# Altium PCB H01R0.PcbDoc
Units mil, origin at the board's own origin, x right, y up, seen from the top; angles counter-clockwise.
Board outline 1363.78 x 1181.1 mil, 2 copper layers (Top Layer, Bottom Layer); 38 components, 23 nets, 101 pads, 0 vias.
Unrouted connection lines stored in the file: 52.
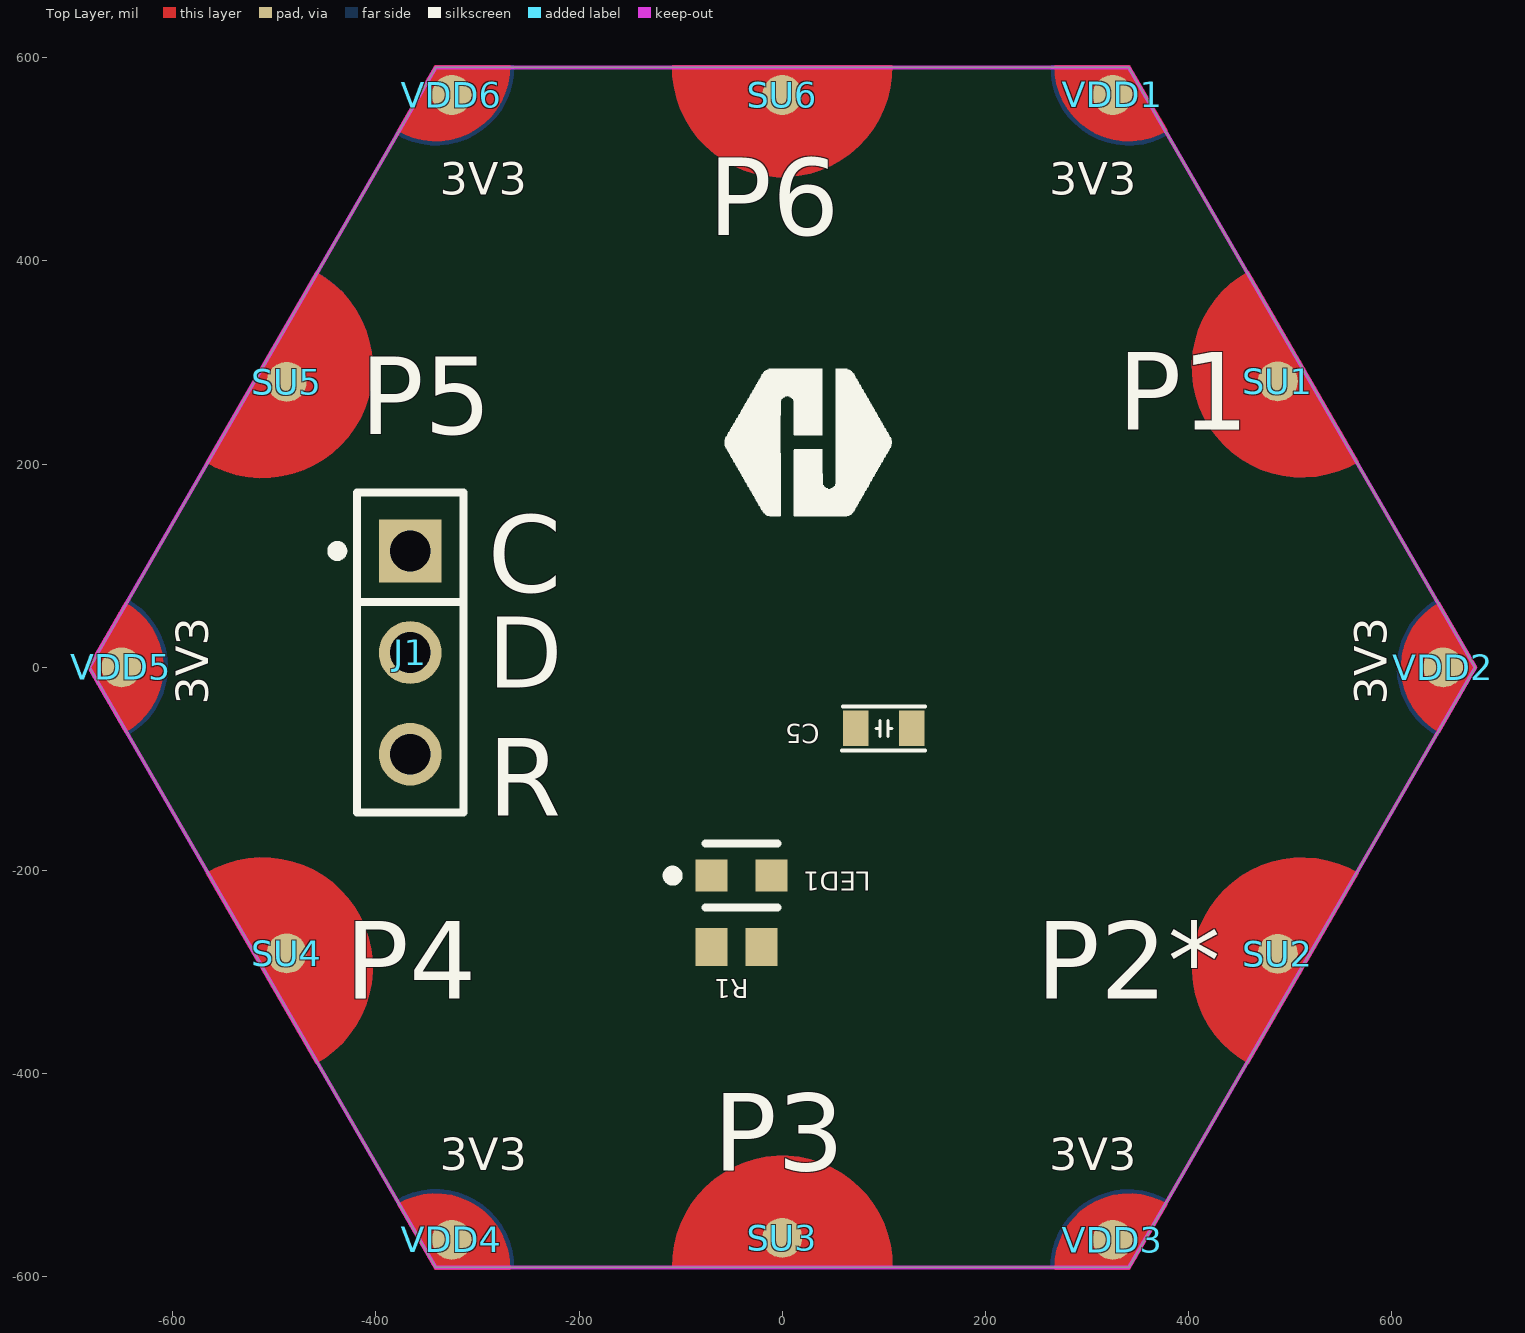
[diagram p0: Top Layer view]
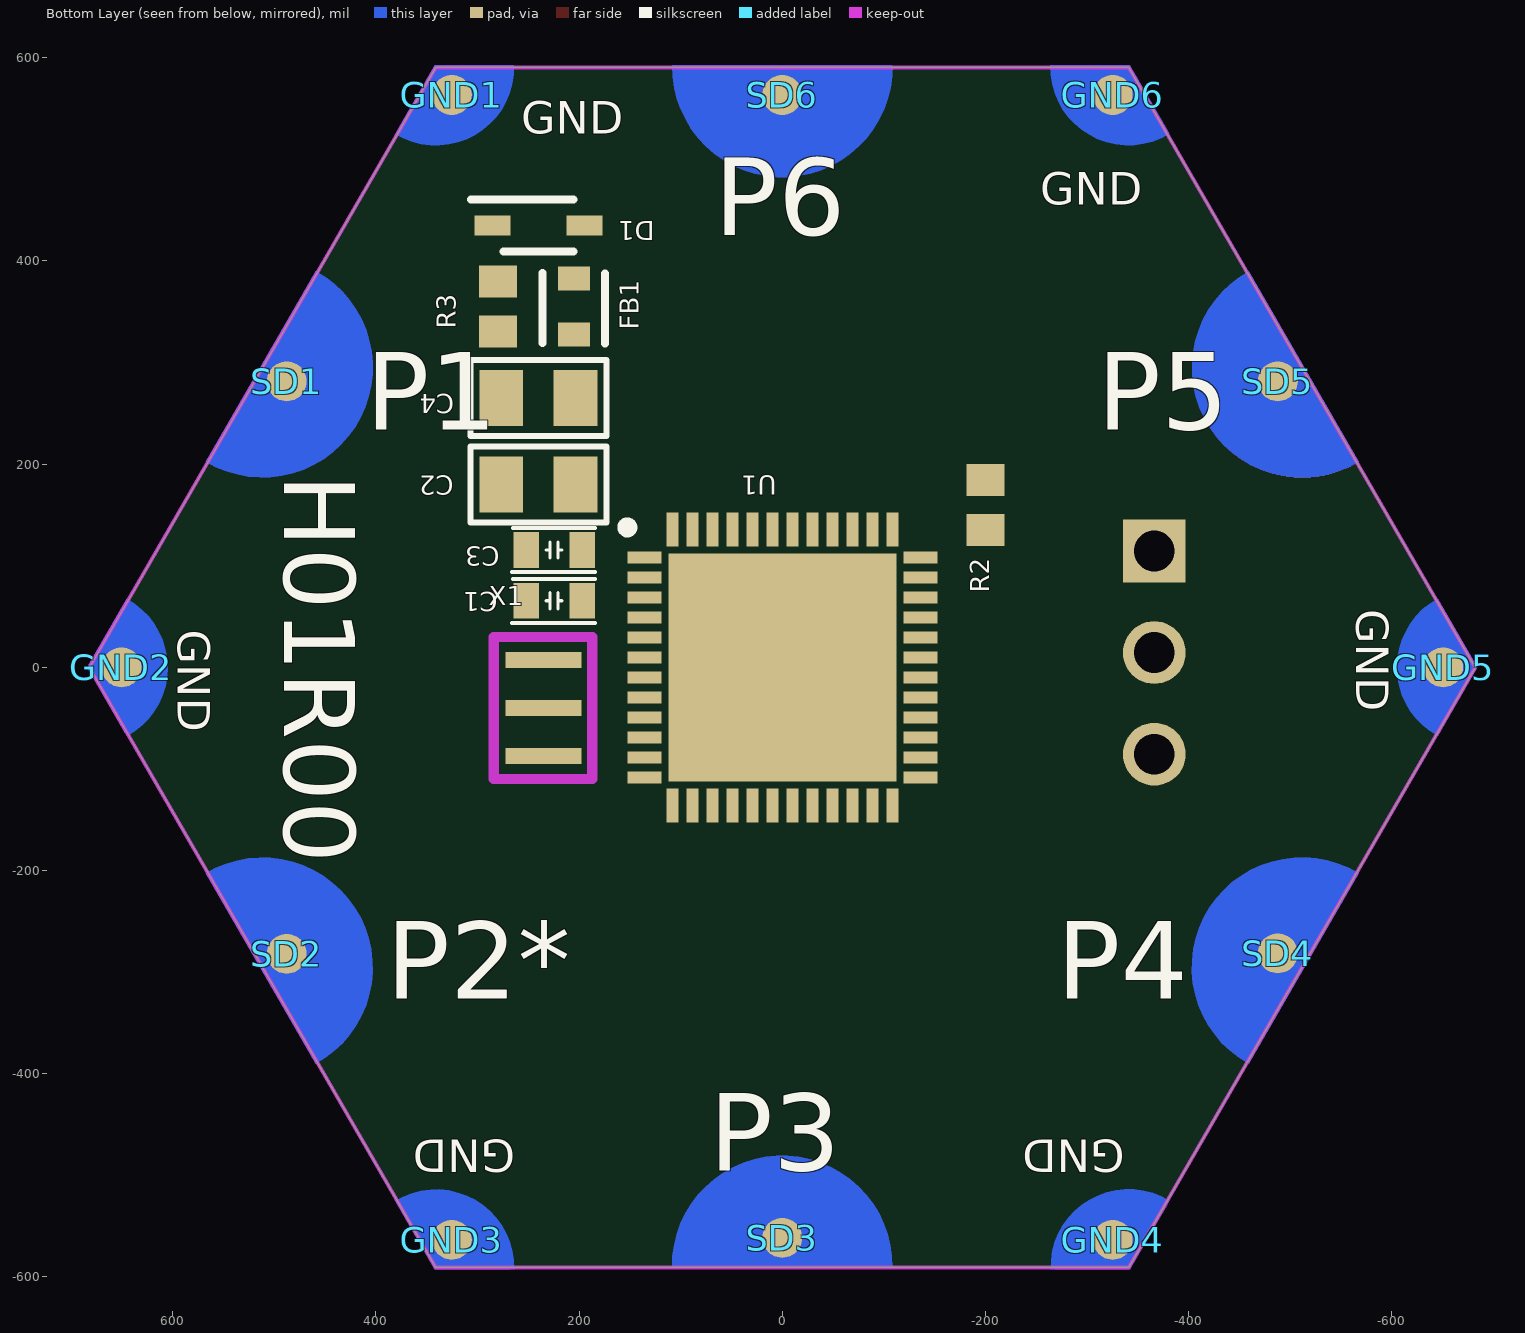
[diagram p1: Bottom Layer view, seen from below]

## Layer stack, top to bottom
Top Solder: solder mask 0.4, Solder Resist, Dk 3.5
Top Layer: signal copper 1.4
Dielectric 1: dielectric 12.6, FR-4, Dk 4.8
Bottom Layer: signal copper 1.4
Bottom Solder: solder mask 0.4, Solder Resist, Dk 3.5

## Board outline
-340.94,-590.55 340.94,-590.55 681.89,0 340.94,590.55 -340.94,590.55 -681.89,0

## Design rules (kind name [scope] priority, off if disabled: settings)
Clearance [All] p1: gap=10 ignorepadtopadclearanceinfootprint=FALSE
PolygonConnect [All] p1: connectstyle=Relief reliefconductorwidth=10 reliefentries=4 polygonreliefangle="90 Angle" airgapwidth=10
RoutingVias [All] p1: holewidth=28 width=50 viastyle="Through Hole" minholewidth=28 minwidth=50 maxholewidth=28 maxwidth=50
SolderMaskExpansion [All] p1: expansion=4 istentingtop=FALSE
SupplyNets "Schematic Supply Nets_3" [InNet('GND')] p1: voltage=0.000
SupplyNets "Schematic Supply Nets_2" [InNet('VDDA')] p2: voltage=0.000
SupplyNets "Schematic Supply Nets_1" [InNet('VSSA')] p3: voltage=0.000
SupplyNets "Schematic Supply Nets" [InNet('VDD')] p4: voltage=0.000
Width [All] p1: maxlimit=10 minlimit=10 preferedwidth=10
30 further rules are at their usual default settings.

## Components (designator, comment, footprint, x,y, rotation, side; value= is the part's Value field where it differs from the comment)
C1 "CL10B104KA8NNNC" C0603 224.63,65.59 r180 bottom value=100nF
C2 "CL21X475KAQNNNE" C0805 240,180 r0 bottom value=4.7µF
C3 "CL10B104KA8NNNC" C0603 224.63,115.59 r180 bottom value=100nF
C4 "CC0805KKX7R7BB105" C0805 240,265 r180 bottom value=1µF
C5 "CL10B104KA8NNNC" C0603 100,-60 r0 top value=100nF
D1 "CDSOD323-T03SC" SOD2513X114N 240,435 r180 bottom value=200pF
FB1 "MMZ1608Y300B" FP-MMZ1608-0_8-MFG 205,355 r270 bottom
GND1 "HEXABIT_UART_PORT" HEXABIT_POWER_PORT_D 325.2,563.39 r0 top
GND2 "HEXABIT_UART_PORT" HEXABIT_POWER_PORT_D 650.39,0 r300 top
GND3 "HEXABIT_UART_PORT" HEXABIT_POWER_PORT_D 325.2,-563.39 r240 top
GND4 "HEXABIT_UART_PORT" HEXABIT_POWER_PORT_D -325.2,-563.39 r180 top
GND5 "HEXABIT_UART_PORT" HEXABIT_POWER_PORT_D -650.39,0 r120 top
GND6 "HEXABIT_UART_PORT" HEXABIT_POWER_PORT_D -325.2,563.39 r60 top
J1 "TSW-103-14-G-S" FP-TSW-103-14-G-S-MFG -366.16,14.58 r270 top
LED1 "VLMS1300-GS08" FP-6_541-5092_01-4-MFG -40,-205 r0 top
R1 "Manufacturer Part Number" R0603 -45,-275 r180 top value=270Ω
R2 "Manufacturer Part Number" R0603 -200,160 r90 bottom value=10kΩ
R3 "Manufacturer Part Number" R0603 280,355 r270 bottom
SD1 "HEXABIT_UART_PORT" HEXABIT_UART_PORT_D 487.8,281.5 r0 top
SD2 "HEXABIT_UART_PORT" HEXABIT_UART_PORT_D 487.8,-281.89 r300 top
SD3 "HEXABIT_UART_PORT" HEXABIT_UART_PORT_D 0,-561.5 r240 top
SD4 "HEXABIT_UART_PORT" HEXABIT_UART_PORT_D -487.8,-281.5 r180 top
SD5 "HEXABIT_UART_PORT" HEXABIT_UART_PORT_D -487.8,281.5 r120 top
SD6 "HEXABIT_UART_PORT" HEXABIT_UART_PORT_D 0,563.39 r60 top
SU1 "HEXABIT_UART_PORT" HEXABIT_UART_PORT_U 487.8,281.5 r0 top
SU2 "HEXABIT_UART_PORT" HEXABIT_UART_PORT_U 487.8,-281.89 r300 top
SU3 "HEXABIT_UART_PORT" HEXABIT_UART_PORT_U 0,-561.5 r240 top
SU4 "HEXABIT_UART_PORT" HEXABIT_UART_PORT_U -487.8,-281.5 r180 top
SU5 "HEXABIT_UART_PORT" HEXABIT_UART_PORT_U -487.8,281.11 r120 top
SU6 "HEXABIT_UART_PORT" HEXABIT_UART_PORT_U 0,563.39 r60 top
U1 "STM32G0B1CEU6" QFN50P700X700X65-49N-D 0,0 r180 bottom
VDD1 "HEXABIT_UART_PORT" HEXABIT_POWER_PORT_U 325.2,563.39 r60 top
VDD2 "HEXABIT_UART_PORT" HEXABIT_POWER_PORT_U 650.39,0 r0 top
VDD3 "HEXABIT_UART_PORT" HEXABIT_POWER_PORT_U 325.2,-563.39 r300 top
VDD4 "HEXABIT_UART_PORT" HEXABIT_POWER_PORT_U -325.2,-563.39 r240 top
VDD5 "HEXABIT_UART_PORT" HEXABIT_POWER_PORT_U -650.39,0 r180 top
VDD6 "HEXABIT_UART_PORT" HEXABIT_POWER_PORT_U -325.2,563.39 r120 top
X1 "CSTCE8M00G52Z-R0" XTALL_CSTCE8M00G52 235,-40 r0 bottom value=10pF

## Footprints (in the part's own frame and the unit in brackets; to place one, negate y for a bottom-side part, rotate by r counter-clockwise, add the part's x,y. Pads: shape width x height; smd on the part's side, far side on the other; paste and mask are expansions set on the pad)
C0603 [mm]
  rect 0.64x0.89 smd mask+0.05: 1(-0.7,0) 2(0.7,0)
  silkscreen extent -1.05,-0.55 1.02,0.55, body extent -0.9,-0.5 0.9,0.5, height 1.4
C0805 [mil]
  rect 43x55 smd: 1(-36.5,0) 2(36.5,0)
  silkscreen extent -67,-37 67,37, body extent -39,-24 40,25, height 31
FP-6_541-5092_01-4-MFG [mm]
  rect 0.8x0.8 smd paste+0 mask+0: 1(-0.75,0) 2(0.75,0)
  silkscreen extent -1.85,-0.8 0.9,0.8, body extent -1.25,-0.6 1.25,0.6, height 0.25
FP-MMZ1608-0_8-MFG [mm]
  rect 0.6x0.8 smd paste+0 mask+0: 1(-0.7,0) 2(0.7,0)
  silkscreen extent -0.85,-0.79 0.92,0.77, body extent -0.8,-0.4 0.8,0.4, height 0.95
FP-TSW-103-14-G-S-MFG [mm]
  rect 1.57x1.57 hole 1.02 paste-2539.97 mask+0: 1(-2.54,0)
  round 1.57 hole 1.02 paste-2539.97 mask+0: 2(0,0) 3(2.54,0)
  silkscreen extent -4,-1.95 4,1.34, body extent -4.1,-1.44 4.1,1.44, height 0.25
HEXABIT_POWER_PORT_D [mm]
  rrect100% 1x1 smd far side paste+0: Pwr_D(0,0)
  Bottom Layer region: 1.418,-0.978 0.633,-1.25 -0.194,-1.171 -0.914,-0.754 -1.394,-0.076 -1.549,0.74 -1.549,0.74 0.429,0.74
HEXABIT_POWER_PORT_U [mm]
  rrect100% 1x1 smd paste+0: Pwr_U(0,0)
  Top Layer region: -0.081,-1.631 -0.68,-1.115 -1.01,-0.395 -1.01,0.395 -0.68,1.115 -0.081,1.631 -0.081,1.631 0.858,0
HEXABIT_UART_PORT_D [mm]
  rrect100% 1x1 smd far side paste+0: UART_D(0,0)
  Bottom Layer region: 2.018,-2.008 0.84,-2.391 -0.386,-2.219 -1.413,-1.526 -2.032,-0.453 -2.117,0.782 -1.653,1.93 -0.731,2.758 -0.731,2.758
HEXABIT_UART_PORT_U [mm]
  rrect100% 1x1 smd paste+0: UART_U(0,0)
  Top Layer region: 2.018,-2.008 0.84,-2.391 -0.386,-2.219 -1.413,-1.526 -2.032,-0.453 -2.117,0.782 -1.653,1.93 -0.731,2.758 -0.731,2.758
QFN50P700X700X65-49N-D [mm]
  rect 0.85x0.3 smd mask+0: 1(-3.45,2.75) 2(-3.45,2.25) 3(-3.45,1.75) 4(-3.45,1.25) 5(-3.45,0.75) 6(-3.45,0.25) 7(-3.45,-0.25) 8(-3.45,-0.75) 9(-3.45,-1.25) 10(-3.45,-1.75) 11(-3.45,-2.25) 12(-3.45,-2.75) 25(3.45,-2.75) 26(3.45,-2.25) 27(3.45,-1.75) 28(3.45,-1.25) 29(3.45,-0.75) 30(3.45,-0.25) 31(3.45,0.25) 32(3.45,0.75) 33(3.45,1.25) 34(3.45,1.75) 35(3.45,2.25) 36(3.45,2.75)
  rect 0.3x0.85 smd mask+0: 13(-2.75,-3.45) 14(-2.25,-3.45) 15(-1.75,-3.45) 16(-1.25,-3.45) 17(-0.75,-3.45) 18(-0.25,-3.45) 19(0.25,-3.45) 20(0.75,-3.45) 21(1.25,-3.45) 22(1.75,-3.45) 23(2.25,-3.45) 24(2.75,-3.45) 37(2.75,3.45) 38(2.25,3.45) 39(1.75,3.45) 40(1.25,3.45) 41(0.75,3.45) 42(0.25,3.45) 43(-0.25,3.45) 44(-0.75,3.45) 45(-1.25,3.45) 46(-1.75,3.45) 47(-2.25,3.45) 48(-2.75,3.45)
  rect 5.7x5.7 smd mask+0: 49(0,0)
  silkscreen extent -4,3.38 -3.75,3.62, body extent -3.56,-3.56 3.56,3.56, height 0.61
R0603 [mm] "Chip Resistor, 2-Leads, Body 1.55x0.85mm, IPC Medium Density"
  rect 0.8x0.95 smd: 1(-0.625,0) 2(0.625,0)
  body extent -0.82,-0.48 0.82,0.48, height 0.5
SOD2513X114N [mm]
  rect 0.9x0.5 smd: 1(-1.15,0) 2(1.15,0)
  silkscreen extent -1.69,-0.65 0.87,0.65, body extent -1.27,-0.65 1.27,0.65, height 1.14
XTALL_CSTCE8M00G52 [mm]
  rect 1.9x0.4 smd: P$1(0,1.2) P$2(0,0) P$3(0,-1.2)
  Top Layer keep-out lines w0.254: -1.219,1.778 -1.219,-1.778 1.245,-1.778 1.245,1.778 -1.219,1.778
  body extent -0.67,-1.6 0.64,1.6, height 0.8

## Part data
C1 C3 C5: library part "generic Capacitor", "Ceramic Capacitor, Multilayer, Ceramic, 25V, 10% +Tol, 10% -Tol, X7R, +-15% TC, 100nF, Surface Mount, 0603 inch", Case Code (Imperial)=0603, Case Code (Metric)=1608, Dielectric=X7R, Dielectric Material=Ceramic, Manufacturer="Samsung Electro-Mechanics", Max Operating Temperature=125°C, Min Operating Temperature=-55°C, Tolerance=10%, Voltage=25V, Case/Package=0603, Category="Ceramic Capacitors", China RoHS=Compliant, ComponentLink1Description=https://datasheet.octopart.com:443/CL10B104KA8NNNC-Samsung-Electro-Mechanics-datasheet-137745067.pdf?src-supplier=Newark, ComponentLink1URL=https://datasheet.octopart.com:443/CL10B104KA8NNNC-Samsung-Electro-Mechanics-datasheet-137745067.pdf?src-supplier=Newark, ComponentLink2Description=https://datasheet.octopart.com:443/CL10B104KA8NNNC-Samsung-Electro-Mechanics-datasheet-181551448.pdf?src-supplier=Newark, ComponentLink2URL=https://datasheet.octopart.com:443/CL10B104KA8NNNC-Samsung-Electro-Mechanics-datasheet-181551448.pdf?src-supplier=Newark, ComponentLink3Description=https://datasheet.octopart.com/CL10B104KA8NNNC-Samsung-Electro-Mechanics-datasheet-8324245.pdf, ComponentLink3URL=https://datasheet.octopart.com/CL10B104KA8NNNC-Samsung-Electro-Mechanics-datasheet-8324245.pdf, ComponentLink4Description=https://datasheet.octopart.com/CL10B104KA8NNNC-Samsung-Electro-Mechanics-datasheet-97040617.pdf, ComponentLink4URL=https://datasheet.octopart.com/CL10B104KA8NNNC-Samsung-Electro-Mechanics-datasheet-97040617.pdf, ComponentLink5Description=https://datasheet.octopart.com/General-Multilayer-Ceramic-Capacitors-Samsung-datasheet-family-111.pdf, ComponentLink5URL=https://datasheet.octopart.com/General-Multilayer-Ceramic-Capacitors-Samsung-datasheet-family-111.pdf, ComponentLink6Description=https://datasheet.octopart.com:443/CL10B104KA8NNNC-Samsung-Electro-Mechanics-datasheet-116890967.pdf?src-supplier=Future+Electronics, ComponentLink6URL=https://datasheet.octopart.com:443/CL10B104KA8NNNC-Samsung-Electro-Mechanics-datasheet-116890967.pdf?src-supplier=Future+Electronics, ComponentLink7Description=https://datasheet.octopart.com:443/CL10B104KA8NNNC-Samsung-Electro-Mechanics-datasheet-81461838.pdf?src-supplier=Future+Electronics, ComponentLink7URL=https://datasheet.octopart.com:443/CL10B104KA8NNNC-Samsung-Electro-Mechanics-datasheet-81461838.pdf?src-supplier=Future+Electronics, ComponentLink8Description=https://datasheet.octopart.com:443/CL10B104KA8NNNC-Samsung-datasheet-42770371.pdf?src-supplier=Future+Electronics, ComponentLink8URL=https://datasheet.octopart.com:443/CL10B104KA8NNNC-Samsung-datasheet-42770371.pdf?src-supplier=Future+Electronics, ComponentLink9Description=https://datasheet.octopart.com:443/CL10B104KA8NNNC-Samsung-datasheet-26589152.pdf?src-supplier=Future+Electronics, ComponentLink9URL=https://datasheet.octopart.com:443/CL10B104KA8NNNC-Samsung-datasheet-26589152.pdf?src-supplier=Future+Electronics, ComponentLink10Description=https://datasheet.octopart.com:443/CL10B104KA8NNNC-Samsung-Electro-Mechanics-datasheet-149136783.pdf?src-supplier=Future+Electronics, ComponentLink10URL=https://datasheet.octopart.com:443/CL10B104KA8NNNC-Samsung-Electro-Mechanics-datasheet-149136783.pdf?src-supplier=Future+Electronics, ComponentLink11Description=https://datasheet.octopart.com:443/CL10B104KA8NNNC-Samsung-datasheet-59220082.pdf?src-supplier=TME, ComponentLink11URL=https://datasheet.octopart.com:443/CL10B104KA8NNNC-Samsung-datasheet-59220082.pdf?src-supplier=TME, ComponentLink12Description=https://datasheet.octopart.com:443/CL10B104KA8NNNC-Samsung-Electro-Mechanics-datasheet-11756025.pdf?src-supplier=Arrow+Electronics, ComponentLink12URL=https://datasheet.octopart.com:443/CL10B104KA8NNNC-Samsung-Electro-Mechanics-datasheet-11756025.pdf?src-supplier=Arrow+Electronics, ComponentLink13Description=http://sigma.octopart.com:80/rohs_certificate/General-Multilayer-Ceramic-Capacitors-Samsung-family-110.pdf?src-supplier=Compliance+Statements, ComponentLink13URL=http://sigma.octopart.com:80/rohs_certificate/General-Multilayer-Ceramic-Capacitors-Samsung-family-110.pdf?src-supplier=Compliance+Statements, ComponentLink14Description=http://sigma.octopart.com:80/rohs_statement/General-Multilayer-Ceramic-Capacitors-Samsung-family-132.pdf?src-supplier=Compliance+Statements, ComponentLink14URL=http://sigma.octopart.com:80/rohs_statement/General-Multilayer-Ceramic-Capacitors-Samsung-family-132.pdf?src-supplier=Compliance+Statements, ComponentLink15Description=http://sigma.octopart.com:80/reach_statement/General-Multilayer-Ceramic-Capacitors-Samsung-family-133.pdf?src-supplier=Compliance+Statements, ComponentLink15URL=http://sigma.octopart.com:80/reach_statement/General-Multilayer-Ceramic-Capacitors-Samsung-family-133.pdf?src-supplier=Compliance+Statements, Depth=800µm, Height=800µm, Lead Free="Lead Free", Length=1.6mm, Library=Hexabitz, Lifecycle Status=Production, Manufacturer Part Number=CL10B104KA8NNNC, Material=Ceramic, Mounting Technology="Surface Mount", Number of Terminals=2, Pricing="4000=0.00265, 8000=0.00263, 16000=0.00262, 24000=0.00261, 32000=0.00259 (USD)", Radiation Hardening=No, REACH SVHC=Yes, RoHS=Compliant, Schedule B="8532240020, 8532240020|8532240020, 8532240020|8532240020|8532240020, 8532240020|8532240020|8532240020|8532240020", Stock=1332000, Supplier=Avnet, Supplier Part Number=CL10B104KA8NNNC, Thickness=889µm, Voltage Rating=25V, Voltage Rating (DC)=25V, Width=800µm
C2: library part "generic Capacitor", "Ceramic Capacitor, Multilayer, Ceramic, 25V, 10% +Tol, 10% -Tol, X6S, +-22% TC, 4.7uF, Surface Mount, 0805 inch", Case Code (Imperial)=0805, Case Code (Metric)=2012, Dielectric=X6S, Dielectric Material=Ceramic, Manufacturer="Samsung Electro-Mechanics", Max Operating Temperature=105°C, Min Operating Temperature=-55°C, Supplier Part Number=1276-3033-1-ND, Tolerance=10%, Voltage Rating=25V, Case/Package=0805, Category="Ceramic Capacitors", China RoHS=Compliant, ComponentLink1Description=https://datasheet.octopart.com:443/CL21X475KAQNNNE-Samsung-Electro-Mechanics-datasheet-141347921.pdf?src-supplier=IHS, ComponentLink1URL=https://datasheet.octopart.com:443/CL21X475KAQNNNE-Samsung-Electro-Mechanics-datasheet-141347921.pdf?src-supplier=IHS, ComponentLink2Description=https://datasheet.octopart.com/CL21X475KAQNNNE-Samsung-Electro-Mechanics-datasheet-97040617.pdf, ComponentLink2URL=https://datasheet.octopart.com/CL21X475KAQNNNE-Samsung-Electro-Mechanics-datasheet-97040617.pdf, ComponentLink3Description=https://datasheet.octopart.com/CL21X475KAQNNNE-Samsung-Electro-Mechanics-datasheet-8324245.pdf, ComponentLink3URL=https://datasheet.octopart.com/CL21X475KAQNNNE-Samsung-Electro-Mechanics-datasheet-8324245.pdf, ComponentLink4Description=https://datasheet.octopart.com:443/CL21X475KAQNNNE-Samsung-datasheet-8326817.pdf?src-supplier=Future+Electronics, ComponentLink4URL=https://datasheet.octopart.com:443/CL21X475KAQNNNE-Samsung-datasheet-8326817.pdf?src-supplier=Future+Electronics, ComponentLink5Description=https://datasheet.octopart.com:443/CL21X475KAQNNNE-Samsung-datasheet-8326407.pdf?src-supplier=TME, ComponentLink5URL=https://datasheet.octopart.com:443/CL21X475KAQNNNE-Samsung-datasheet-8326407.pdf?src-supplier=TME, ComponentLink6Description=https://datasheet.octopart.com:443/CL21X475KAQNNNE-Samsung-Electro-Mechanics-datasheet-11541288.pdf?src-supplier=Arrow+Electronics, ComponentLink6URL=https://datasheet.octopart.com:443/CL21X475KAQNNNE-Samsung-Electro-Mechanics-datasheet-11541288.pdf?src-supplier=Arrow+Electronics, Depth=1.25mm, Height=1.4mm, Lead Free="Lead Free", Length=2mm, Library=Hexabitz, Lifecycle Status=Production, Manufacturer Part Number=CL21X475KAQNNNE, Material=Ceramic, Mounting Technology="Surface Mount", Number of Terminals=2, Packaging="Tape & Reel (TR)", Pricing="1=0.21, 10=0.124, 50=0.0886, 100=0.0778, 500=0.05972, 1000=0.05414 (USD)", REACH SVHC=Yes, RoHS=Compliant, Schedule B="8532240020, 8532240020|8532240020, 8532240020|8532240020|8532240020, 8532240020|8532240020|8532240020|8532240020", Stock=251721, Supplier=DigiKey, Thickness=1.397mm, Voltage Rating (DC)=25V, Width=1.25mm
C4: library part "generic Capacitor", "Ceramic Capacitor, Ceramic, 16V, 10% +Tol, 10% -Tol, X7R, 15% TC, 1uF, Surface Mount, 0805", Case Code (Imperial)=0805, Case Code (Metric)=2012, Dielectric=X7R, Dielectric Material=Ceramic, Manufacturer="Yageo Group", Manufacturer Package Identifier=CC0805-0.85, Max Operating Temperature=125°C, Min Operating Temperature=-55°C, Supplier Part Number=9937277, Tolerance=10%, Voltage Rating=16V, Case/Package=0805, Category="Ceramic Capacitors", China RoHS=Compliant, ComponentLink1Description=https://datasheet.octopart.com:443/CC0805KKX7R7BB105-Yageo-datasheet-177165144.pdf?src-supplier=IHS, ComponentLink1URL=https://datasheet.octopart.com:443/CC0805KKX7R7BB105-Yageo-datasheet-177165144.pdf?src-supplier=IHS, ComponentLink2Description=https://datasheet.octopart.com:443/CC0805KKX7R7BB105-Yageo-datasheet-78855689.pdf?src-supplier=Upverter, ComponentLink2URL=https://datasheet.octopart.com:443/CC0805KKX7R7BB105-Yageo-datasheet-78855689.pdf?src-supplier=Upverter, ComponentLink3Description=https://datasheet.octopart.com/CC0805KKX7R7BB105-Yageo-datasheet-10883670.pdf, ComponentLink3URL=https://datasheet.octopart.com/CC0805KKX7R7BB105-Yageo-datasheet-10883670.pdf, ComponentLink4Description=https://datasheet.octopart.com:443/CC0805KKX7R7BB105-Yageo-datasheet-140260305.pdf?src-supplier=SOS+electronic, ComponentLink4URL=https://datasheet.octopart.com:443/CC0805KKX7R7BB105-Yageo-datasheet-140260305.pdf?src-supplier=SOS+electronic, ComponentLink5Description=https://datasheet.octopart.com:443/CC0805KKX7R7BB105-Yageo-datasheet-147453679.pdf?src-supplier=Farnell, ComponentLink5URL=https://datasheet.octopart.com:443/CC0805KKX7R7BB105-Yageo-datasheet-147453679.pdf?src-supplier=Farnell, ComponentLink6Description=https://datasheet.octopart.com:443/CC0805KKX7R7BB105-Yageo-datasheet-181969634.pdf?src-supplier=Farnell, ComponentLink6URL=https://datasheet.octopart.com:443/CC0805KKX7R7BB105-Yageo-datasheet-181969634.pdf?src-supplier=Farnell, ComponentLink7Description=https://datasheet.octopart.com:443/CC0805KKX7R7BB105-Yageo-datasheet-62336348.pdf?src-supplier=element14+APAC, ComponentLink7URL=https://datasheet.octopart.com:443/CC0805KKX7R7BB105-Yageo-datasheet-62336348.pdf?src-supplier=element14+APAC, ComponentLink8Description=https://datasheet.octopart.com:443/CC0805KKX7R7BB105-Yageo-datasheet-166511530.pdf?src-supplier=Future+Electronics, ComponentLink8URL=https://datasheet.octopart.com:443/CC0805KKX7R7BB105-Yageo-datasheet-166511530.pdf?src-supplier=Future+Electronics, ComponentLink9Description=https://datasheet.octopart.com:443/CC0805KKX7R7BB105-Yageo-datasheet-137700082.pdf?src-supplier=Future+Electronics, ComponentLink9URL=https://datasheet.octopart.com:443/CC0805KKX7R7BB105-Yageo-datasheet-137700082.pdf?src-supplier=Future+Electronics, ComponentLink10Description=https://datasheet.octopart.com:443/CC0805KKX7R7BB105-Yageo-datasheet-137700084.pdf?src-supplier=Future+Electronics, ComponentLink10URL=https://datasheet.octopart.com:443/CC0805KKX7R7BB105-Yageo-datasheet-137700084.pdf?src-supplier=Future+Electronics, ComponentLink11Description=https://datasheet.octopart.com:443/CC0805KKX7R7BB105-Yageo-datasheet-27626582.pdf?src-supplier=Future+Electronics, ComponentLink11URL=https://datasheet.octopart.com:443/CC0805KKX7R7BB105-Yageo-datasheet-27626582.pdf?src-supplier=Future+Electronics, ComponentLink12Description=https://datasheet.octopart.com:443/CC0805KKX7R7BB105-Yageo-datasheet-15895757.pdf?src-supplier=Future+Electronics, ComponentLink12URL=https://datasheet.octopart.com:443/CC0805KKX7R7BB105-Yageo-datasheet-15895757.pdf?src-supplier=Future+Electronics, ComponentLink13Description=https://datasheet.octopart.com:443/CC0805KKX7R7BB105-Yageo-datasheet-12526321.pdf?src-supplier=Future+Electronics, ComponentLink13URL=https://datasheet.octopart.com:443/CC0805KKX7R7BB105-Yageo-datasheet-12526321.pdf?src-supplier=Future+Electronics, ComponentLink14Description=https://datasheet.octopart.com:443/CC0805KKX7R7BB105-Yageo-datasheet-10911834.pdf?src-supplier=Future+Electronics, ComponentLink14URL=https://datasheet.octopart.com:443/CC0805KKX7R7BB105-Yageo-datasheet-10911834.pdf?src-supplier=Future+Electronics, ComponentLink15Description=https://datasheet.octopart.com:443/CC0805KKX7R7BB105-Yageo-datasheet-8324442.pdf?src-supplier=Future+Electronics, ComponentLink15URL=https://datasheet.octopart.com:443/CC0805KKX7R7BB105-Yageo-datasheet-8324442.pdf?src-supplier=Future+Electronics, ComponentLink16Description=https://datasheet.octopart.com:443/CC0805KKX7R7BB105-Yageo-Group-datasheet-165992755.pdf?src-supplier=ODG+(Origin+Data+Global), ComponentLink16URL=https://datasheet.octopart.com:443/CC0805KKX7R7BB105-Yageo-Group-datasheet-165992755.pdf?src-supplier=ODG+(Origin+Data+Global), ComponentLink17Description=https://datasheet.octopart.com:443/CC0805KKX7R7BB105-Yageo-datasheet-151948686.pdf?src-supplier=TME, ComponentLink17URL=https://datasheet.octopart.com:443/CC0805KKX7R7BB105-Yageo-datasheet-151948686.pdf?src-supplier=TME, ComponentLink18Description=https://datasheet.octopart.com:443/CC0805KKX7R7BB105-Yageo-datasheet-8324192.pdf?src-supplier=TME, ComponentLink18URL=https://datasheet.octopart.com:443/CC0805KKX7R7BB105-Yageo-datasheet-8324192.pdf?src-supplier=TME, ComponentLink19Description=https://datasheet.octopart.com:443/CC0805KKX7R7BB105-Yageo-datasheet-120101875.pdf?src-supplier=Megastar, ComponentLink19URL=https://datasheet.octopart.com:443/CC0805KKX7R7BB105-Yageo-datasheet-120101875.pdf?src-supplier=Megastar, ComponentLink20Description=https://datasheet.octopart.com:443/CC0805KKX7R7BB105-Yageo-datasheet-8701427.pdf?src-supplier=element14, ComponentLink20URL=https://datasheet.octopart.com:443/CC0805KKX7R7BB105-Yageo-datasheet-8701427.pdf?src-supplier=element14, ComponentLink21Description=https://datasheet.octopart.com:443/CC0805KKX7R7BB105-Yageo-datasheet-499490.pdf?src-supplier=element14, ComponentLink21URL=https://datasheet.octopart.com:443/CC0805KKX7R7BB105-Yageo-datasheet-499490.pdf?src-supplier=element14, ComponentLink22Description=https://datasheet.octopart.com:443/CC0805KKX7R7BB105-Yageo-datasheet-5301394.pdf?src-supplier=element14, ComponentLink22URL=https://datasheet.octopart.com:443/CC0805KKX7R7BB105-Yageo-datasheet-5301394.pdf?src-supplier=element14, ComponentLink23Description=http://sigma.octopart.com:80/rohs_statement/Yageo-company-2.pdf?src-supplier=Compliance+Statements, ComponentLink23URL=http://sigma.octopart.com:80/rohs_statement/Yageo-company-2.pdf?src-supplier=Compliance+Statements, ComponentLink24Description=http://sigma.octopart.com:80/conflict_mineral_statement/Yageo-company-3.pdf?src-supplier=Compliance+Statements, ComponentLink24URL=http://sigma.octopart.com:80/conflict_mineral_statement/Yageo-company-3.pdf?src-supplier=Compliance+Statements, Depth=1.25mm, Halogen Free="Halogen Free", Height=1.25mm, Lead Free="Lead Free", Length=2mm, Library=Hexabitz, Lifecycle Status=Production, Manufacturer Part Number=CC0805KKX7R7BB105, Material=Ceramic, Mounting Technology="Surface Mount", Number of Terminals=2, Pins=2, Pricing="3000=0.0057, 12000=0.0055, 45000=0.0053, 90000=0.0052, 225000=0.005 (USD)", Radiation Hardening=No, REACH SVHC=Yes, RoHS=Compliant, Schedule B="8532240020, 8532240020|8532240020|8532240020|8532240020|8532240020|8532240020|8532240020|8532240020|8532240020|8532240020|8532240020|8532240020, 8532240020|8532240020|8532240020|8532240020|8532240020|8532240020|8532240020|8532240020|8532240020|8532240020|8532240020|8532240020|8532240020, 8532240020|8532240020|8532240020|8532240020|8532240020|8532240020|8532240020|8532240020|8532240020|8532240020|8532240020|8532240020|8532240020|8532240020", Stock=384000, Supplier="Future Electronics", Termination=SMD/SMT, Thickness=1.2446mm, Voltage Rating (DC)=16V, Width=1.25mm
D1: "A 3V, 350W, bi-directional, standard capacitance, SOD323 pkg TVS Diode", Breakdown Voltage=4V, Clamping Voltage=10.9V, Leakage Current=125µA, Manufacturer=Bourns, Max Operating Temperature=150°C, Max Power Dissipation=400W, Max Surge Current=43A, Min Operating Temperature=-55°C, Operating Supply Voltage=3.3V, Power Line Protection=No, Supplier Part Number=CDSOD323-T03SCDKR-ND, Category="TVS Diodes", China RoHS=Compliant, ComponentLink1Description=https://datasheet.octopart.com:443/CDSOD323-T03SC-Bourns-datasheet-179966067.pdf?src-supplier=IHS, ComponentLink1URL=https://datasheet.octopart.com:443/CDSOD323-T03SC-Bourns-datasheet-179966067.pdf?src-supplier=IHS, ComponentLink2Description=https://datasheet.octopart.com:443/CDSOD323-T03SC-Bourns-datasheet-134530207.pdf?src-supplier=Electro+Sonic, ComponentLink2URL=https://datasheet.octopart.com:443/CDSOD323-T03SC-Bourns-datasheet-134530207.pdf?src-supplier=Electro+Sonic, ComponentLink3Description=https://datasheet.octopart.com:443/CDSOD323-T03SC-Bourns-datasheet-11734656.pdf?src-supplier=Burklin+Elektronik, ComponentLink3URL=https://datasheet.octopart.com:443/CDSOD323-T03SC-Bourns-datasheet-11734656.pdf?src-supplier=Burklin+Elektronik, ComponentLink4Description=https://datasheet.octopart.com:443/CDSOD323-T03SC-Bourns-datasheet-37162147.pdf?src-supplier=Farnell, ComponentLink4URL=https://datasheet.octopart.com:443/CDSOD323-T03SC-Bourns-datasheet-37162147.pdf?src-supplier=Farnell, ComponentLink5Description=https://datasheet.octopart.com:443/CDSOD323-T03SC-Bourns-datasheet-159777421.pdf?src-supplier=RS+(Formerly+Allied+Electronics), ComponentLink5URL=https://datasheet.octopart.com:443/CDSOD323-T03SC-Bourns-datasheet-159777421.pdf?src-supplier=RS+(Formerly+Allied+Electronics), ComponentLink6Description=http://sigma.octopart.com:80/conflict_mineral_statement/Bourns-company-36.pdf?src-supplier=Compliance+Statements, ComponentLink6URL=http://sigma.octopart.com:80/conflict_mineral_statement/Bourns-company-36.pdf?src-supplier=Compliance+Statements, Composition=Zener, Contact Plating=Tin, Depth=1.45mm, Direction=Bidirectional, Element Configuration=Single, Length=1.9mm, Library=Hexabitz, Lifecycle Status=Production, Manufacturer Part Number=CDSOD323-T03SC, Min Breakdown Voltage=4V, Mounting Technology="Surface Mount", Number of Bidirectional Channels=1, Number of Channels=1, Number of Elements=1, Number of Terminals=2, Peak Pulse Current=43A, Peak Pulse Power=400W, Peak Reverse Current=125µA, Pins=2, Polarity=Bidirectional, Pricing="1=0.69, 10=0.604, 100=0.418, 500=0.343, 1000=0.297 (USD)", Radiation Hardening=No, REACH SVHC=Yes, Reverse Standoff Voltage=3.3V, RoHS=Compliant, Stock=937, Supplier=DigiKey, Supplier 1=DigiKey, Supplier Part Number 1=CDSOD323-T03SCDKR-ND, Termination=SMD/SMT, Working Voltage=3.3V
FB1: "Ferrite Beads 0603 30ohms 1500mA Signal Line AEC-Q200", Case Code (Imperial)=0603, Case Code (Metric)=1608, Current Rating=1.5A, DC Resistance (DCR)=50mΩ, Manufacturer=TDK, Manufacturer Lifecycle Status=PRODUCTION, Manufacturer Part Number=MMZ1608Y300BTD25, Max Operating Temperature=125°C, Min Operating Temperature=-55°C, Ratings=AEC-Q200, Supplier Part Number=445-MMZ1608Y300BTD25DKR-ND, Supplier Part Number 1=445-MMZ1608Y300BTA00DKR-ND, Test Frequency=100MHz, Tolerance=25%, Case/Package=0603, Category="Ferrite Beads and Chips", ComponentLink1Description=https://datasheet.octopart.com:443/MMZ1608Y300BTD25-TDK-datasheet-181268448.pdf?src-supplier=IHS, ComponentLink1URL=https://datasheet.octopart.com:443/MMZ1608Y300BTD25-TDK-datasheet-181268448.pdf?src-supplier=IHS, ComponentLink2Description=https://datasheet.octopart.com:443/MMZ1608Y300BTD25-TDK-datasheet-151367874.pdf?src-supplier=TDK, ComponentLink2URL=https://datasheet.octopart.com:443/MMZ1608Y300BTD25-TDK-datasheet-151367874.pdf?src-supplier=TDK, Core Material=Ferrite, ESR=50mΩ, Height=800µm, Impedance=30Ω, Length=1.6mm, Library=Hexabitz, Lifecycle Status=Production, Max Current Rating=1.5A, Max DC Current=1.5A, Max Length=1.75mm, Max Width=950µm, Min Length=1.45mm, Min Width=650µm, Mounting Technology="Surface Mount", Number of Circuits=1, Number of Lines=1, Number of Terminals=2, Packaging="Tape & Reel (TR)", Pricing="1=0.1, 10=0.06, 25=0.052, 50=0.0468, 100=0.0419, 250=0.03612, 500=0.03214, 1000=0.02847 (USD)", REACH SVHC=Yes, RMS Current (Irms)=1.5A, RoHS=Compliant, Stock=11896, Supplier=DigiKey, Supplier 1=Digikey, Termination=SMD/SMT, Weight=2.012816mg, Width=800µm
GND1 GND2 GND3 GND4 GND5 GND6: library part HEXABIT_POWER_PORT_D
J1: library part CMP-02766-001743-1, "CONN HEADER VERT 3POS 2.54MM", Color=Black, Flammability Rating="UL94 V-0", Max Current Rating=7.6A, Max Operating Temperature=125°C, Max Voltage Rating (AC)=550V, Min Operating Temperature=-55°C, Package Quantity=1, Connector Type=Header, Contact Finish - Mating=GOLD, Contact Material=Bronze, Contact Mating Length=0.32inch, Contact Plating=Gold, Contact Shape=Square, Contact Type="Male Pin", Depth=2.54mm, Fastening Type=Pull, Gender=Male, Height=10.67mm, Housing Color=Black, Housing Material=Polyester, Insulation Color=Black, Insulation Material=PBT, Lead Free="Lead Free", Length=7.62mm, Mount="Through Hole", Number of Contacts=3, Number of Positions=3, Number of Rows=1, Orientation=Straight, Packaging=Bulk, Pitch=2.54mm, Radiation Hardening=No, REACH SVHC="No SVHC", RoHS Compliant=Yes, Series=TSW, Termination=Solder, Width=2.54mm
LED1: "LED Uni-Color Super Red 639nm 2-Pin Chip 0603(1608Metric) T/R", Case Code (Imperial)=0603, Case Code (Metric)=1608, Color=Red, Forward Current=20mA, Forward Voltage=2V, Manufacturer="Vishay Semiconductors", Max Operating Temperature=85°C, Min Operating Temperature=-35°C, Package Quantity=1, Power Rating=75mW, Supplier Part Number=VLMS1300-GS08DKR-ND, Case/Package=0603, Category=LEDs, ComponentLink1Description=https://datasheet.ciiva.com/26322/vlmo1300-26322153.pdf?src-supplier=Element14, ComponentLink1URL=https://datasheet.ciiva.com/26322/vlmo1300-26322153.pdf?src-supplier=Element14, ComponentLink2Description=https://datasheet.ciiva.com/8028/vlmo1300-8028047.pdf?src-supplier=Element14, ComponentLink2URL=https://datasheet.ciiva.com/8028/vlmo1300-8028047.pdf?src-supplier=Element14, ComponentLink3Description=https://datasheet.ciiva.com/9333/vlmo1300-9333743.pdf?src-supplier=Avnet, ComponentLink3URL=https://datasheet.ciiva.com/9333/vlmo1300-9333743.pdf?src-supplier=Avnet, ComponentLink4Description=https://datasheet.ciiva.com/16510/vlmo1300-16510985.pdf?src-supplier=Future+Electronics, ComponentLink4URL=https://datasheet.ciiva.com/16510/vlmo1300-16510985.pdf?src-supplier=Future+Electronics, ComponentLink5Description=https://datasheet.ciiva.com/2114/vlmo1300-2114930.pdf?src-supplier=Digikey, ComponentLink5URL=https://datasheet.ciiva.com/2114/vlmo1300-2114930.pdf?src-supplier=Digikey, ComponentLink6Description=https://datasheet.ciiva.com/2114/vlmo1300-2114931.pdf?src-supplier=Digikey, ComponentLink6URL=https://datasheet.ciiva.com/2114/vlmo1300-2114931.pdf?src-supplier=Digikey, ComponentLink7Description=https://datasheet.ciiva.com/2114/vlmo1300-2114929.pdf?src-supplier=Digikey, ComponentLink7URL=https://datasheet.ciiva.com/2114/vlmo1300-2114929.pdf?src-supplier=Digikey, Dominant Wavelength=631nm, Height=0.8mm, Illumination Color=Red, Lead Free="Lead Free", Length=1.6mm, Lens Style=Rectangular,Clear, Library=Hexabitz, Luminous Intensity=54mcd, Manufacturer Part Number=VLMS1300-GS08, Mounting Technology="Surface Mount", Number of LEDs=1, Packaging="Tape and Reel", Pricing="1=0.21, 10=0.143, 100=0.0998, 500=0.07982, 1000=0.07322 (USD)", Radiation Hardening=No, Reach SVHC Compliant=Unknown, RoHS=Yes, RoHS Compliant=Yes, Series=CHipLED, Stock=56745, Supplier=Digikey, Supplier 1=Digikey, Supplier Part Number 1=VLMS1300-GS08DKR-ND, Test Current=20mA, Viewing Angle=130°, Wavelength=631nm, Width=0.8mm
R1: library part "generic Resistor", "Res Thick Film 0603 270 Ohm 5% 0.1W(1/10W) ±200ppm/C Pad SMD Automotive T/R", Case Code (Imperial)=0603, Manufacturer=Panasonic, Manufacturer Part Number=ERJ-3GEYJ271V, Max Operating Temperature=155°C, Max Power Dissipation=100mW, Min Operating Temperature=-55°C, Temperature Coefficient=200ppm/°C, Tolerance=5%, Voltage Rating=75V, Case/Package=0603, Category="Chip SMD Resistors", ComponentLink1Description=https://datasheet.octopart.com:443/ERJ-3GEYJ271V-Panasonic-datasheet-13266872.pdf?src-supplier=RS+(Formerly+Allied+Electronics), ComponentLink1URL=https://datasheet.octopart.com:443/ERJ-3GEYJ271V-Panasonic-datasheet-13266872.pdf?src-supplier=RS+(Formerly+Allied+Electronics), ComponentLink2Description=https://datasheet.octopart.com:443/ERJ-3GEYJ271V-Panasonic-datasheet-5314550.pdf?src-supplier=Future+Electronics, ComponentLink2URL=https://datasheet.octopart.com:443/ERJ-3GEYJ271V-Panasonic-datasheet-5314550.pdf?src-supplier=Future+Electronics, ComponentLink3Description=https://datasheet.octopart.com:443/ERJ-3GEYJ271V-Panasonic-datasheet-61114972.pdf?src-supplier=Panasonic+SCT, ComponentLink3URL=https://datasheet.octopart.com:443/ERJ-3GEYJ271V-Panasonic-datasheet-61114972.pdf?src-supplier=Panasonic+SCT, ComponentLink4Description=https://datasheet.octopart.com:443/ERJ-3GEYJ271V-Panasonic-datasheet-147443676.pdf?src-supplier=Master+Electronics, ComponentLink4URL=https://datasheet.octopart.com:443/ERJ-3GEYJ271V-Panasonic-datasheet-147443676.pdf?src-supplier=Master+Electronics, ComponentLink5Description=https://datasheet.octopart.com:443/ERJ-3GEYJ271V-Panasonic-datasheet-10554283.pdf?src-supplier=element14+APAC, ComponentLink5URL=https://datasheet.octopart.com:443/ERJ-3GEYJ271V-Panasonic-datasheet-10554283.pdf?src-supplier=element14+APAC, ComponentLink6Description=https://datasheet.octopart.com:443/ERJ3GEYJ271V-Panasonic-datasheet-165581512.pdf?src-supplier=TME, ComponentLink6URL=https://datasheet.octopart.com:443/ERJ3GEYJ271V-Panasonic-datasheet-165581512.pdf?src-supplier=TME, ComponentLink7Description=https://datasheet.octopart.com:443/ERJ-3GEYJ271V-Panasonic-datasheet-164353788.pdf?src-supplier=Newark, ComponentLink7URL=https://datasheet.octopart.com:443/ERJ-3GEYJ271V-Panasonic-datasheet-164353788.pdf?src-supplier=Newark, ComponentLink8Description=https://datasheet.octopart.com:443/ERJ3GEYJ271V-Panasonic-datasheet-136608608.pdf?src-supplier=Farnell, ComponentLink8URL=https://datasheet.octopart.com:443/ERJ3GEYJ271V-Panasonic-datasheet-136608608.pdf?src-supplier=Farnell, ComponentLink9Description=https://datasheet.octopart.com:443/ERJ-3GEYJ271V-Panasonic---ECG-datasheet-15994758.pdf?src-supplier=Farnell, ComponentLink9URL=https://datasheet.octopart.com:443/ERJ-3GEYJ271V-Panasonic---ECG-datasheet-15994758.pdf?src-supplier=Farnell, ComponentLink10Description=https://datasheet.octopart.com:443/ERJ-3GEYJ271V-Panasonic-datasheet-5313456.pdf?src-supplier=Farnell, ComponentLink10URL=https://datasheet.octopart.com:443/ERJ-3GEYJ271V-Panasonic-datasheet-5313456.pdf?src-supplier=Farnell, ComponentLink11Description=https://datasheet.octopart.com/ERJ-3GEYJ271V-Panasonic-datasheet-78375410.pdf, ComponentLink11URL=https://datasheet.octopart.com/ERJ-3GEYJ271V-Panasonic-datasheet-78375410.pdf, ComponentLink12Description=https://datasheet.octopart.com/Thick-Film-Chip-Resistors-Panasonic-datasheet-family-105.pdf, ComponentLink12URL=https://datasheet.octopart.com/Thick-Film-Chip-Resistors-Panasonic-datasheet-family-105.pdf, ComponentLink13Description=https://datasheet.octopart.com:443/ERJ-3GEYJ271V-Panasonic-datasheet-7538305.pdf?src-supplier=Jameco, ComponentLink13URL=https://datasheet.octopart.com:443/ERJ-3GEYJ271V-Panasonic-datasheet-7538305.pdf?src-supplier=Jameco, ComponentLink14Description=https://datasheet.octopart.com:443/ERJ-3GEYJ271V-Panasonic-datasheet-118655.pdf?src-supplier=DigiKey, ComponentLink14URL=https://datasheet.octopart.com:443/ERJ-3GEYJ271V-Panasonic-datasheet-118655.pdf?src-supplier=DigiKey, ComponentLink15Description=https://datasheet.octopart.com:443/ERJ3GEYJ271V-Panasonic-datasheet-27908757.pdf?src-supplier=Electro+Sonic, ComponentLink15URL=https://datasheet.octopart.com:443/ERJ3GEYJ271V-Panasonic-datasheet-27908757.pdf?src-supplier=Electro+Sonic, ComponentLink16Description=https://datasheet.octopart.com:443/ERJ-3GEYJ271V-Panasonic-datasheet-37173568.pdf?src-supplier=Electro+Sonic, ComponentLink16URL=https://datasheet.octopart.com:443/ERJ-3GEYJ271V-Panasonic-datasheet-37173568.pdf?src-supplier=Electro+Sonic, Composition="Thick Film", Contact Plating=Tin, Depth=800µm, Features="Automotive AEC-Q200", Height=450µm, Lead Free="Lead Free", Length=1.6mm, Library=Hexabitz, Lifecycle Status=Production, Military Standard=Not, Mounting Technology="Surface Mount", Number of Terminals=2, Number of Terminations=2, Packaging="Cut Tape", Power Dissipation=100mW, Power Rating=100mW, Pricing="5000=0.00355, 10000=0.00348, 20000=0.00342, 30000=0.00335, 40000=0.00329 (USD)", Radiation Hardening=No, REACH SVHC=Yes, RoHS=Compliant, Schedule B="8533210045, 8533210045|8533210045|8533210045|8533210045|8533210045|8533210045|8533210045|8533210045|8533210045|8533210045|8533210045|8533210045|8533210045|8533210045|8533210045|8533210045|8533210045|8533210045|8533210045|8533210045|8533210045|8533210045|8533210045|85", Stock=45000, Supplier=Avnet, Supplier Part Number=ERJ-3GEYJ271V, Termination=SMD/SMT, Voltage Rating (DC)=75V, Width=800µm, Working Voltage=75V
R2: library part "generic Resistor", "100mW Thick Film Resistors ±100ppm/℃ ±1% 10kΩ 0603 Chip Resistor - Surface Mount ROHS", Case Code (Imperial)=0603, Manufacturer="Yageo Group", Manufacturer Part Number=RC0603FR-0710KL, Max Operating Temperature=155°C, Min Operating Temperature=-55°C, Power Dissipation=100mW, Supplier Part Number=4023214, Temperature Coefficient=100ppm/°C, Tolerance=1%, Voltage Rating=75V, Voltage Rating (DC)=50V, Case Code (Metric)=0603, Case/Package=0603, Category="Chip SMD Resistors", China RoHS=Non-Compliant, ComponentLink1Description=https://datasheet.octopart.com:443/RC0603FR-0710KL-Yageo-datasheet-175887523.pdf?src-supplier=IHS, ComponentLink1URL=https://datasheet.octopart.com:443/RC0603FR-0710KL-Yageo-datasheet-175887523.pdf?src-supplier=IHS, ComponentLink2Description=https://datasheet.octopart.com:443/RC0603FR-0710KL-Yageo-datasheet-103092701.pdf?src-supplier=Upverter, ComponentLink2URL=https://datasheet.octopart.com:443/RC0603FR-0710KL-Yageo-datasheet-103092701.pdf?src-supplier=Upverter, ComponentLink3Description=https://datasheet.octopart.com:443/RC0603FR-0710KL-Yageo-datasheet-98239111.pdf?src-supplier=Upverter, ComponentLink3URL=https://datasheet.octopart.com:443/RC0603FR-0710KL-Yageo-datasheet-98239111.pdf?src-supplier=Upverter, ComponentLink4Description=https://datasheet.octopart.com:443/RC0603FR-0710KL-Yageo-datasheet-141265859.pdf?src-supplier=Upverter, ComponentLink4URL=https://datasheet.octopart.com:443/RC0603FR-0710KL-Yageo-datasheet-141265859.pdf?src-supplier=Upverter, ComponentLink5Description=https://sigma.octopart.com:443/138820526/technical_drawing/Yageo-RC0603FR-0710KL.pdf?src-supplier=Upverter, ComponentLink5URL=https://sigma.octopart.com:443/138820526/technical_drawing/Yageo-RC0603FR-0710KL.pdf?src-supplier=Upverter, ComponentLink6Description=https://datasheet.octopart.com:443/RC0603FR-0710KL-Yageo-datasheet-8328172.pdf?src-supplier=Farnell, ComponentLink6URL=https://datasheet.octopart.com:443/RC0603FR-0710KL-Yageo-datasheet-8328172.pdf?src-supplier=Farnell, ComponentLink7Description=https://datasheet.octopart.com:443/RC0603FR-0710KL-Yageo-datasheet-13691069.pdf?src-supplier=Farnell, ComponentLink7URL=https://datasheet.octopart.com:443/RC0603FR-0710KL-Yageo-datasheet-13691069.pdf?src-supplier=Farnell, ComponentLink8Description=https://datasheet.octopart.com:443/RC0603FR-0710KL-Yageo-datasheet-62067350.pdf?src-supplier=element14+APAC, ComponentLink8URL=https://datasheet.octopart.com:443/RC0603FR-0710KL-Yageo-datasheet-62067350.pdf?src-supplier=element14+APAC, ComponentLink9Description=https://datasheet.octopart.com:443/RC0603FR-0710KL-Yageo-datasheet-17842380.pdf?src-supplier=element14+APAC, ComponentLink9URL=https://datasheet.octopart.com:443/RC0603FR-0710KL-Yageo-datasheet-17842380.pdf?src-supplier=element14+APAC, ComponentLink10Description=https://datasheet.octopart.com:443/RC0603FR-0710KL-Yageo-datasheet-15599030.pdf?src-supplier=Future+Electronics, ComponentLink10URL=https://datasheet.octopart.com:443/RC0603FR-0710KL-Yageo-datasheet-15599030.pdf?src-supplier=Future+Electronics, ComponentLink11Description=https://datasheet.octopart.com:443/RC0603FR-0710KL-Yageo-datasheet-164759695.pdf?src-supplier=Future+Electronics, ComponentLink11URL=https://datasheet.octopart.com:443/RC0603FR-0710KL-Yageo-datasheet-164759695.pdf?src-supplier=Future+Electronics, ComponentLink12Description=https://datasheet.octopart.com:443/RC0603FR-0710KL-Yageo-datasheet-127823281.pdf?src-supplier=Future+Electronics, ComponentLink12URL=https://datasheet.octopart.com:443/RC0603FR-0710KL-Yageo-datasheet-127823281.pdf?src-supplier=Future+Electronics, ComponentLink13Description=https://datasheet.octopart.com:443/RC0603FR-0710KL-Yageo-datasheet-137700087.pdf?src-supplier=Future+Electronics, ComponentLink13URL=https://datasheet.octopart.com:443/RC0603FR-0710KL-Yageo-datasheet-137700087.pdf?src-supplier=Future+Electronics, ComponentLink14Description=https://datasheet.octopart.com:443/RC0603FR-0710KL-Yageo-datasheet-27584510.pdf?src-supplier=Future+Electronics, ComponentLink14URL=https://datasheet.octopart.com:443/RC0603FR-0710KL-Yageo-datasheet-27584510.pdf?src-supplier=Future+Electronics, ComponentLink15Description=https://datasheet.octopart.com:443/RC0603FR-0710KL-Yageo-datasheet-8324193.pdf?src-supplier=Future+Electronics, ComponentLink15URL=https://datasheet.octopart.com:443/RC0603FR-0710KL-Yageo-datasheet-8324193.pdf?src-supplier=Future+Electronics, ComponentLink16Description=https://datasheet.octopart.com:443/RC0603FR-0710KL-Yageo-datasheet-12596169.pdf?src-supplier=Newark, ComponentLink16URL=https://datasheet.octopart.com:443/RC0603FR-0710KL-Yageo-datasheet-12596169.pdf?src-supplier=Newark, ComponentLink17Description=https://datasheet.octopart.com:443/RC0603FR-0710KL-Yageo-datasheet-503470.pdf?src-supplier=Newark, ComponentLink17URL=https://datasheet.octopart.com:443/RC0603FR-0710KL-Yageo-datasheet-503470.pdf?src-supplier=Newark, ComponentLink18Description=https://datasheet.octopart.com:443/RC0603FR-0710KL-Yageo-datasheet-34211833.pdf?src-supplier=Newark, ComponentLink18URL=https://datasheet.octopart.com:443/RC0603FR-0710KL-Yageo-datasheet-34211833.pdf?src-supplier=Newark, ComponentLink19Description=https://datasheet.octopart.com:443/RC0603FR-0710KL-Yageo-datasheet-79472498.pdf?src-supplier=Megastar, ComponentLink19URL=https://datasheet.octopart.com:443/RC0603FR-0710KL-Yageo-datasheet-79472498.pdf?src-supplier=Megastar, ComponentLink20Description=https://datasheet.octopart.com/RC0603FR-0710KL-Yageo-datasheet-73766026.pdf, ComponentLink20URL=https://datasheet.octopart.com/RC0603FR-0710KL-Yageo-datasheet-73766026.pdf, ComponentLink21Description=https://datasheet.octopart.com:443/RC0603FR-0710KL-Yageo-datasheet-118562.pdf?src-supplier=DigiKey, ComponentLink21URL=https://datasheet.octopart.com:443/RC0603FR-0710KL-Yageo-datasheet-118562.pdf?src-supplier=DigiKey, ComponentLink22Description=http://sigma.octopart.com:80/rohs_statement/Yageo-company-2.pdf?src-supplier=Compliance+Statements, ComponentLink22URL=http://sigma.octopart.com:80/rohs_statement/Yageo-company-2.pdf?src-supplier=Compliance+Statements, ComponentLink23Description=http://sigma.octopart.com:80/conflict_mineral_statement/Yageo-company-3.pdf?src-supplier=Compliance+Statements, ComponentLink23URL=http://sigma.octopart.com:80/conflict_mineral_statement/Yageo-company-3.pdf?src-supplier=Compliance+Statements, Composition="Thick Film", Depth=800µm, Height=450µm, Lead Free="Lead Free", Lead Pitch=300µm, Length=1.6mm, Library=Hexabitz, Lifecycle Status=Production, Military Standard=Not, Mounting Technology="Surface Mount", Number of Terminals=2, Packaging="Tape & Reel", Pins=2, Power Rating=100mW, Pricing="5000=0.001, 25000=0.001, 150000=0.001, 500000=0.0009, 1500000=0.0009 (USD)", REACH SVHC=Yes, RoHS=Compliant, Schedule B="8533210045, 8533210045|8533210045|8533210045|8533210045|8533210045|8533210045|8533210045|8533210045|8533210045|8533210045|8533210045|8533210045|8533210045|8533210045|8533210045|8533210045|8533210045|8533210045|8533210045|8533210045|8533210045|8533210045|8533210045|85", Stock=22990000, Supplier="Future Electronics", Termination=SMD/SMT, Weight=2.012816mg, Width=800µm, Working Voltage=75V
R3: library part "generic Resistor", Library=Hexabitz
SD1 SD2 SD3 SD4 SD5 SD6: library part HEXABIT_UART_PORT_D
SU1 SU2 SU3 SU4 SU5 SU6: library part HEXABIT_UART_PORT_U
U1: "MCU 32-bit ARM Cortex M0+ RISC 512KB Flash 1.8V/2.5V/3.3V 48-Pin UFQFPN EP Tray", Manufacturer=STMicroelectronics, Supplier Part Number=497-STM32G0B1CEU6-ND, Category=Microcontrollers, Library=Hexabitz, Manufacturer Part Number=STM32G0B1CEU6, Pricing="1=4.78, 10=3.635, 25=3.3488, 100=3.0347, 260=2.87923, 520=2.7899, 1040=2.71638, 2600=2.63877 (USD)", RoHS=Yes, Stock=4305, Supplier=Digikey, Supplier 1=Digikey, Supplier Part Number 1=497-STM32G0B1CEU6-ND
VDD1 VDD2 VDD3 VDD4 VDD5 VDD6: library part HEXABIT_POWER_PORT_U
X1: "Ceramic Resonator 8MHz ±0.5% (Tol) ±0.2% (Stability) 10pF 40Ohm 3-Pin CSMD T/R", Case Code (Imperial)=1206, Case Code (Metric)=3216, Frequency=8MHz, Frequency Stability=0.2%, Frequency Tolerance=0.5%, Load Capacitance=10pF, Manufacturer=Murata, Max Operating Temperature=125°C, Min Operating Temperature=-40°C, Package Quantity=1, Case/Package=1206, Category=Capacitors, Contact Plating=Gold, Height=0.031inch, Impedance=40R, Length=3.2mm, Library=Hexabitz, Manufacturer Part Number=CSTCE8M00G52Z-R0, Mounting Technology="Surface Mount", Packaging="Tape and Reel", Pins=3, RoHS Compliant=Yes, Self Resonant Frequency=8MHz, Series=CERALOCK®, Termination=SMD/SMT, Tolerance=0.5%, Width=1.3mm

## Nets (pads, with @x,y where several pads share a name; then routed paths per layer and width w, separated by ;. In a path a pad name is that pad's centre, name@x,y a point inside that pad or via, vN(x,y) a via of type N, cw(c..) or ccw(c..) an arc to the next point about the centre after c; other vN are vias at no path point)
CLK_BOOT: J1.1 R2.1 U1.36
DATA: J1.2 U1.35
GND: C5.1 D1.1 GND1.Pwr_D GND2.Pwr_D GND3.Pwr_D GND4.Pwr_D GND5.Pwr_D GND6.Pwr_D R1.1 R2.2 R3.1 U1.49 X1.P$2
NetLED1_1: LED1.1 R1.2
NetLED1_2: LED1.2 U1.19
NetU1_8: U1.8 X1.P$3
NetU1_9: U1.9 X1.P$1
NRST: C5.2 J1.3 U1.10
UART1_RX: SD4.UART_D U1.32
UART1_TX: SU4.UART_U U1.29
UART2_RX: SD2.UART_D U1.14
UART2_TX: SU2.UART_U U1.13
UART3_RX: SD6.UART_D U1.48
UART3_TX: SU6.UART_U U1.47
UART4_RX: SD1.UART_D U1.12
UART4_TX: SU1.UART_U U1.11
UART5_RX: SD5.UART_D U1.41
UART5_TX: SU5.UART_U U1.42
UART6_RX: SD3.UART_D U1.16
UART6_TX: SU3.UART_U U1.15
VDD: D1.2 FB1.1 VDD1.Pwr_U VDD2.Pwr_U VDD3.Pwr_U VDD4.Pwr_U VDD5.Pwr_U VDD6.Pwr_U
VDDA: C1.2 C2.1 C3.2 C4.2 FB1.2 U1.4 U1.5 U1.6
VSSA: C1.1 C2.2 C3.1 C4.1 R3.2 U1.7
pads on no net: U1.1 U1.2 U1.3 U1.17 U1.18 U1.20 U1.21 U1.22 U1.23 U1.24 U1.25 U1.26 U1.27 U1.28 U1.30 U1.31 U1.33 U1.34 U1.37 U1.38 U1.39 U1.40 U1.43 U1.44 U1.45 U1.46

## Keep-outs
Keep-Out Layer:
  the board outline again, w3.94

## Silkscreen, mask and mechanical layers (free items; w line width, h text height)
Top Overlay:
  drawing of 1337 lines, arcs and shapes, not listed
  text "3V3" at -337,465.01 h32
  text "3V3" at 263,465.01 h32
  text "P6" at -73.11,425.36 h76
  text "P1" at 330,234.02 h76
  text "P5" at -415.23,229.56 h76
  text "C" at -290,74.02 h76
  text "D" at -290,-19.99 h70
  text "3V3" at -565.01,-37 h32 r90
  text "3V3" at 594.99,-37 h32 r90
  text "R" at -290,-145.98 h76
  text "P4" at -430,-325.98 h76
  text "P2*" at 250,-325.98 h76
  text "3V3" at -337,-494.99 h32
  text "P3" at -68.14,-495.44 h76
  text "3V3" at 263,-494.99 h32
Bottom Overlay:
  text "GND" at 257,525.01 h32
  text "GND" at -253.7,455.18 h32
  text "P6" at 66.89,425.36 h76
  text "P5" at -310,234.02 h76
  text "P1" at 410,234.02 h76
  text "H01R00" at 490,190 h70 r90
  text "GND" at -565.01,57 h32 r90
  text "GND" at 594.99,37 h32 r90
  text "P4" at -270,-325.98 h76
  text "P2*" at 390,-325.98 h76
  text "GND" at -337,-465.01 h32 r180
  text "GND" at 263,-465.01 h32 r180
  text "P3" at 71.86,-495.44 h76
Top Solder:
  drawing of 20 lines, arcs and shapes, not listed
Dimensions:
  the board outline again, w3.94

## Text inside footprints (layer, text, board x,y; h text height)
C2: Mechanical 32 "2" at 266.5,180 h25 r180; Mechanical 32 "1" at 193.5,180 h25 r180; Mechanical 33 "C40" at 313.5,187.17 h25 r180
C4: Mechanical 32 "2" at 213.5,265 h25; Mechanical 32 "1" at 286.5,265 h25; Mechanical 33 "C40" at 166.5,257.83 h25